# Altium PCB PCB_3U_VHDCI_Baseboard.PCBDOC (part 1 of 2)
Units mil, origin at the board's own origin, x right, y up, seen from the top; angles counter-clockwise.
Board outline 6299 x 3937 mil, 4 copper layers (TopLayer, Internal Plane 1, Internal Plane 2, BottomLayer), stack 58.425 mil thick; 56 components, 165 nets, 629 pads, 192 vias.
Unrouted connection lines stored in the file: 2.
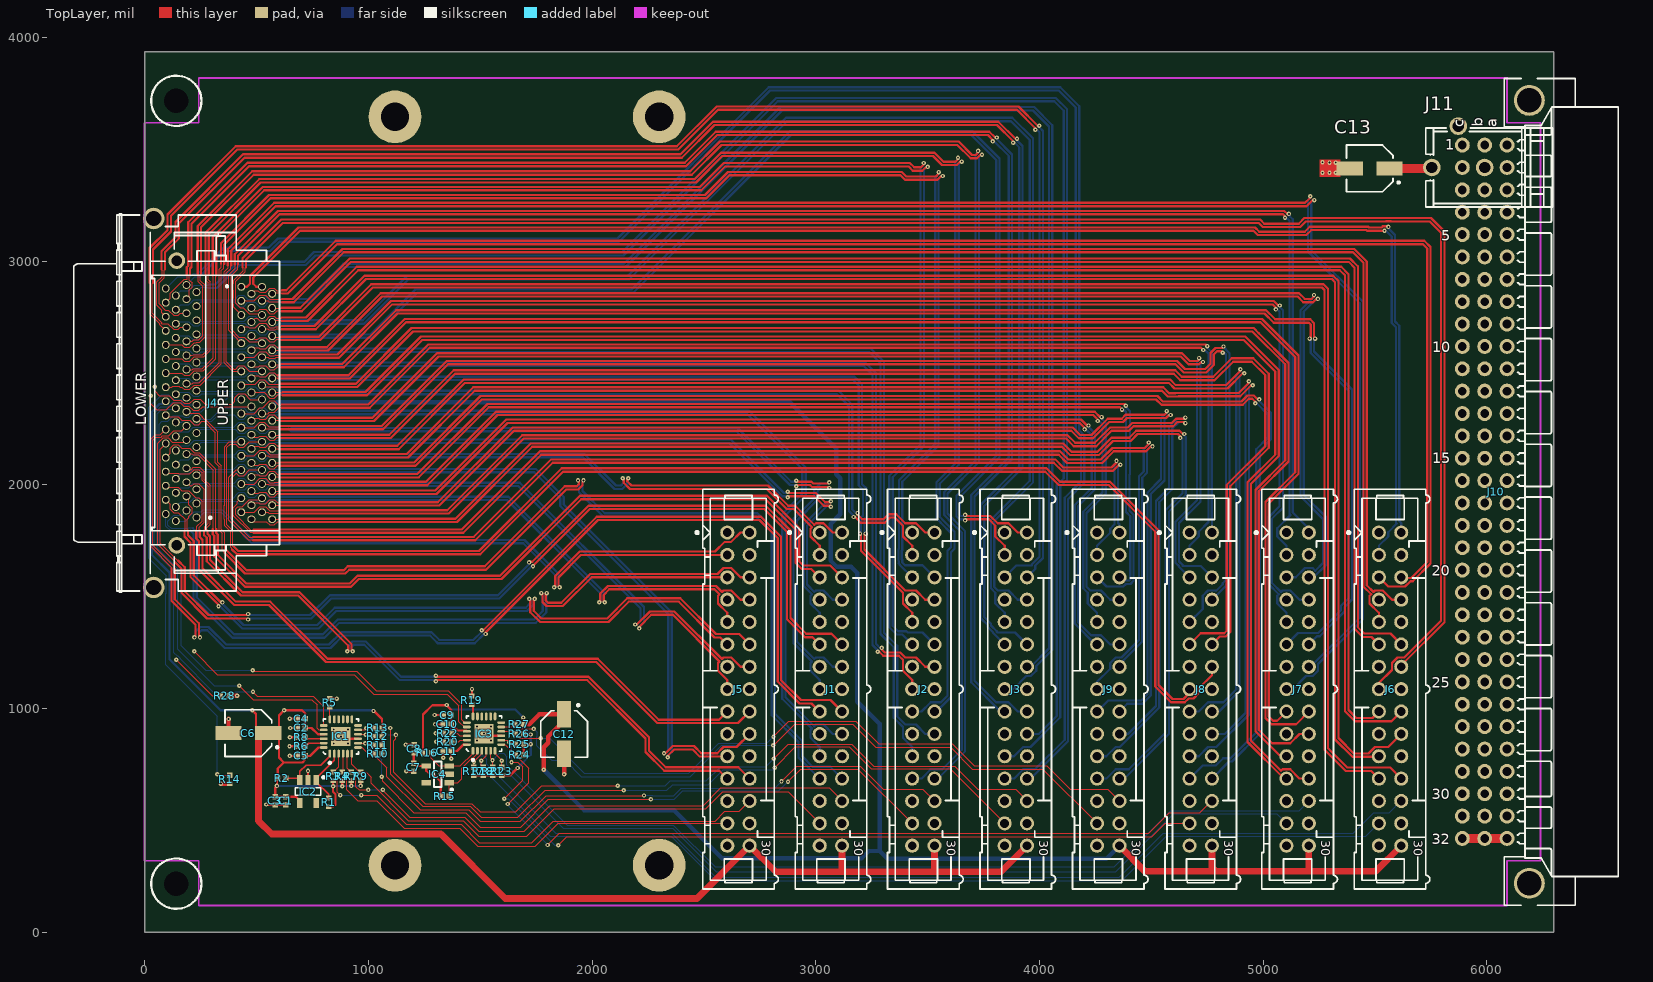
[diagram p0: TopLayer view]
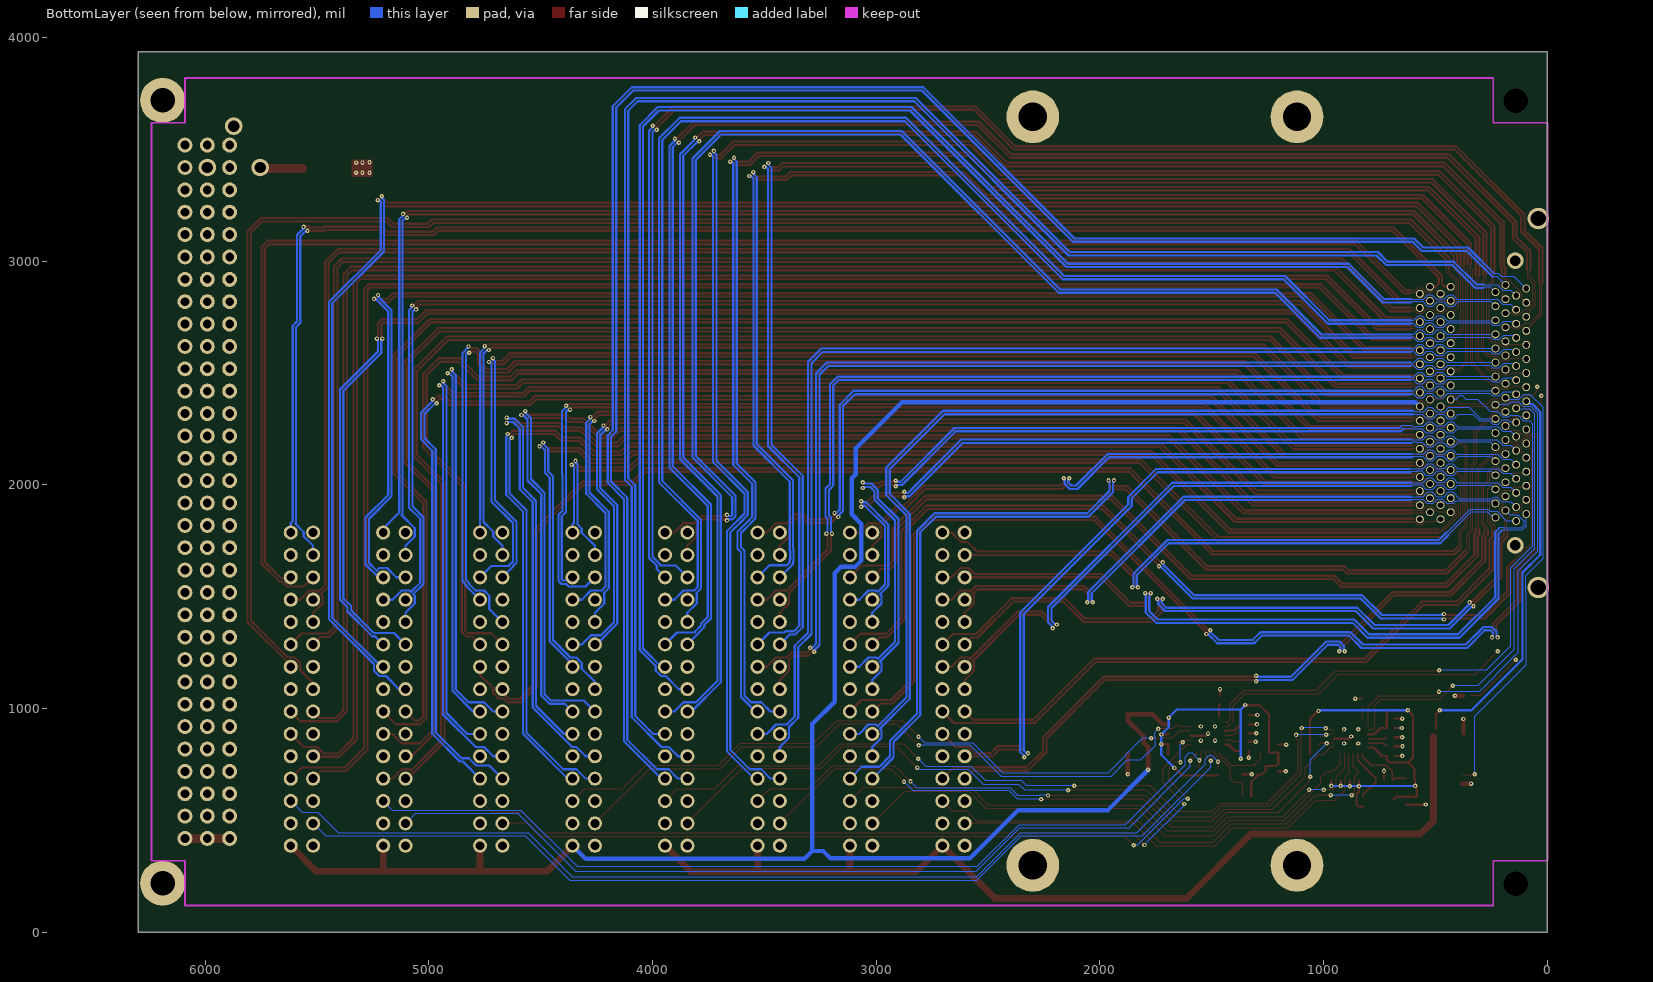
[diagram p1: BottomLayer view, seen from below]
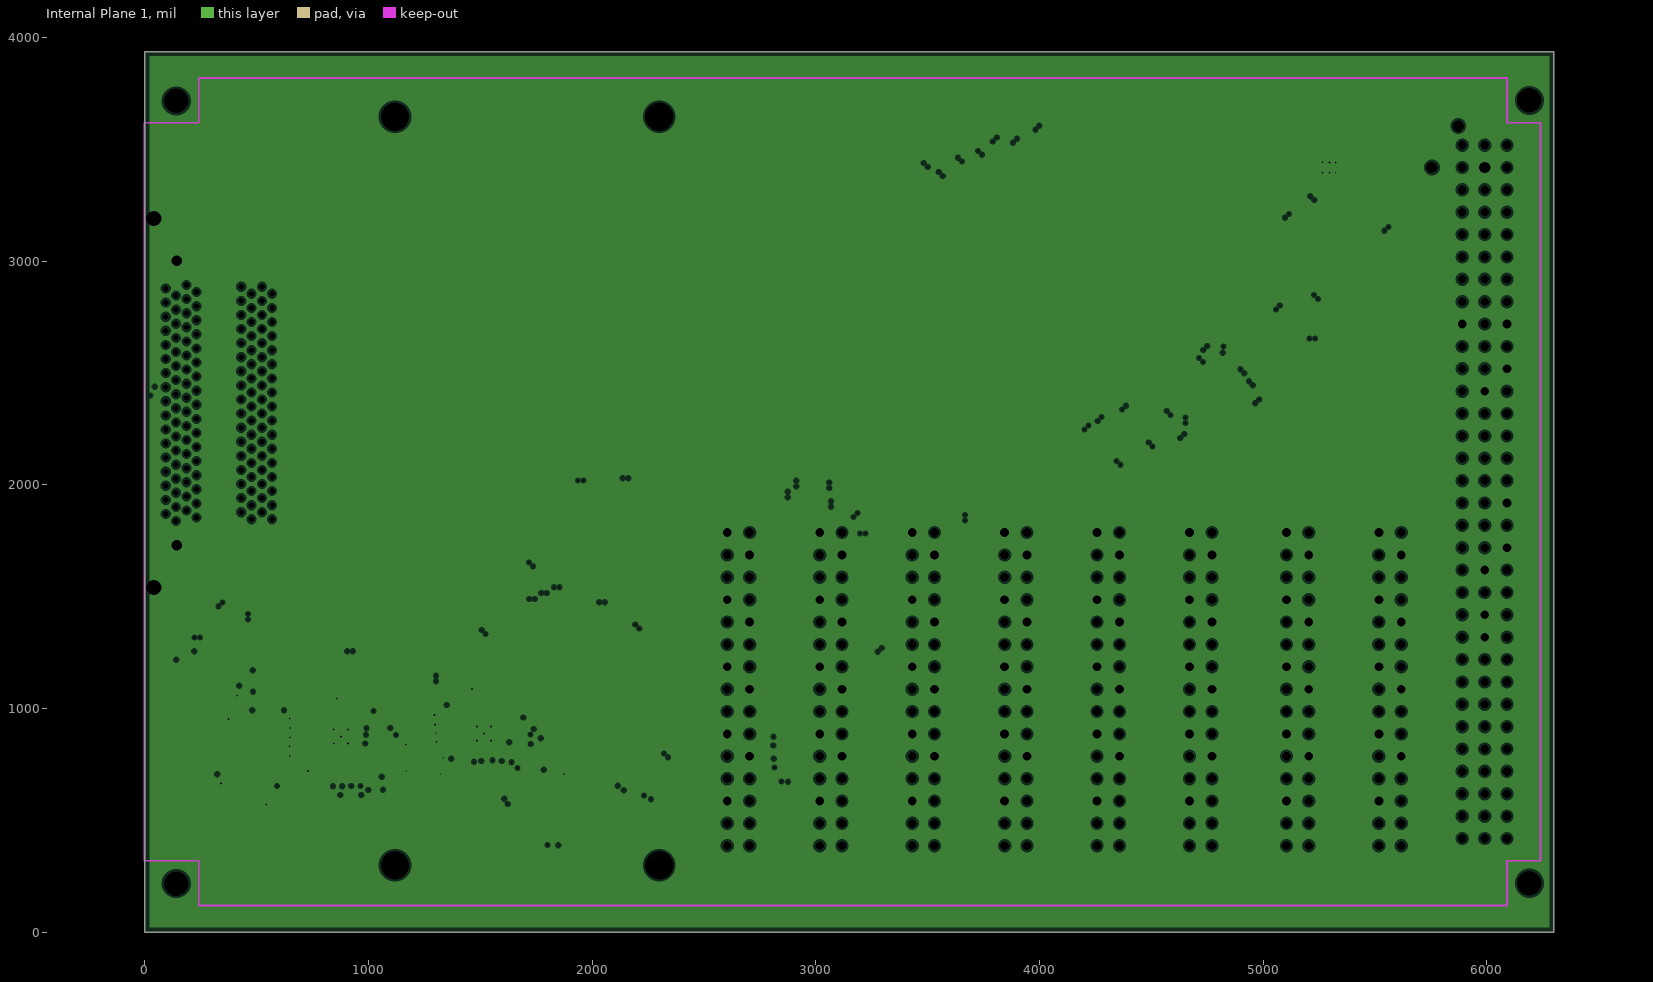
[diagram p2: Internal Plane 1, clearances drawn from the general rule]
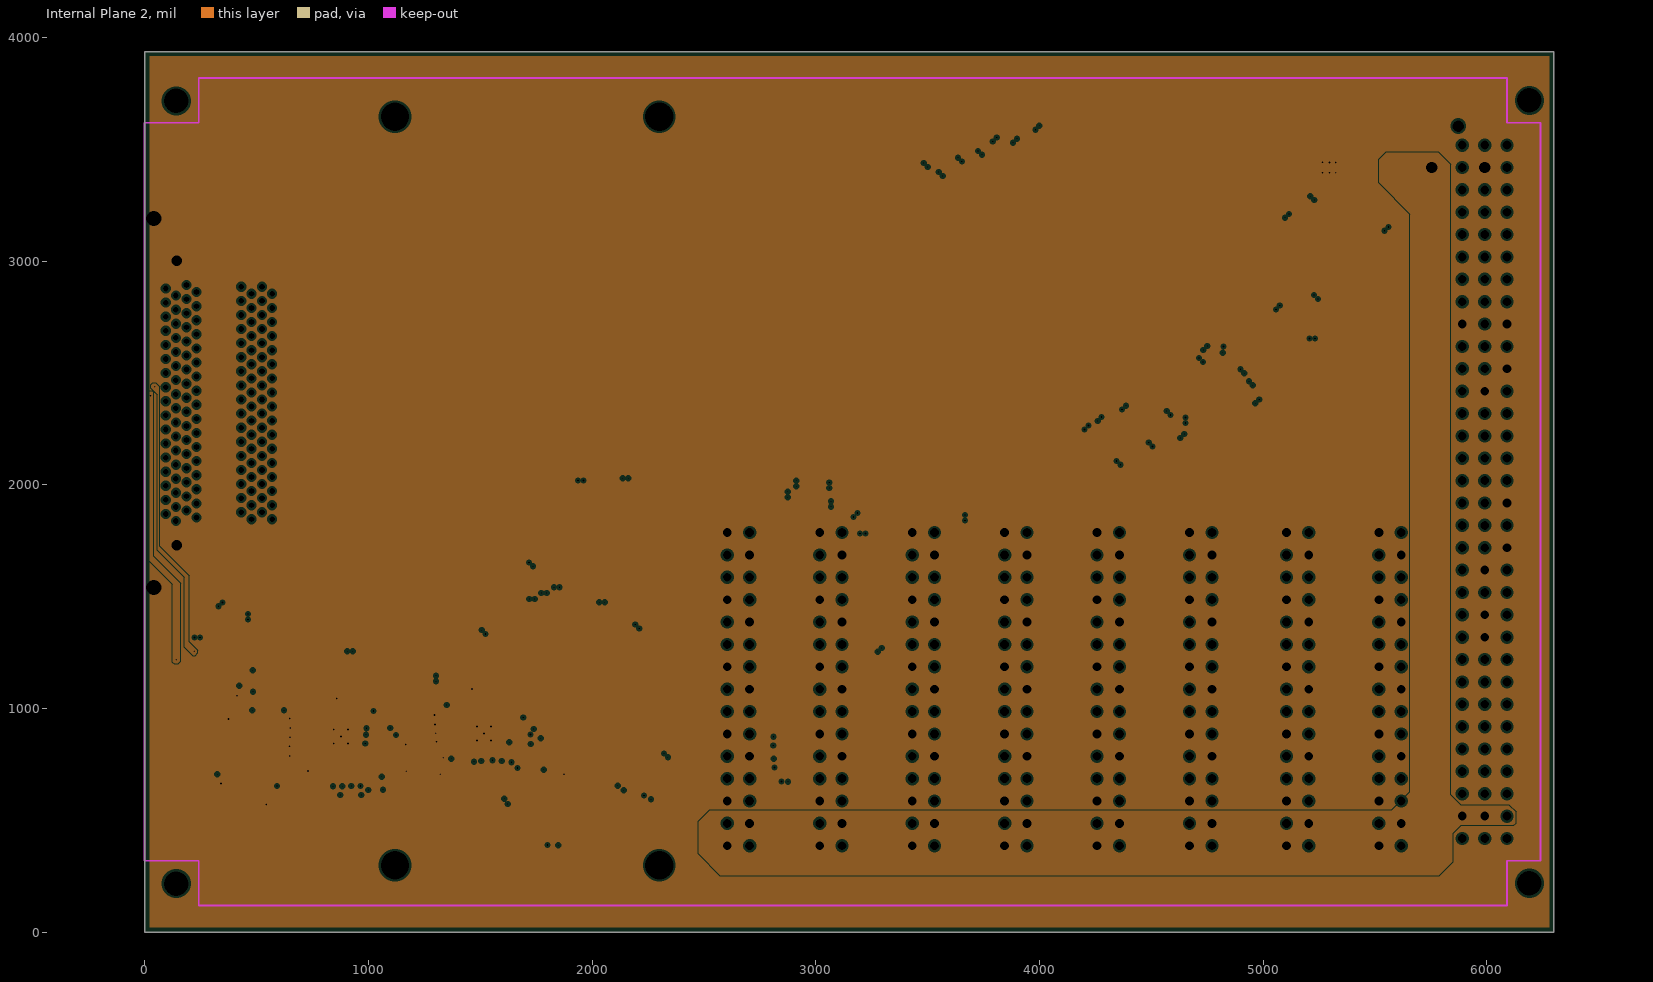
[diagram p3: Internal Plane 2, clearances drawn from the general rule]
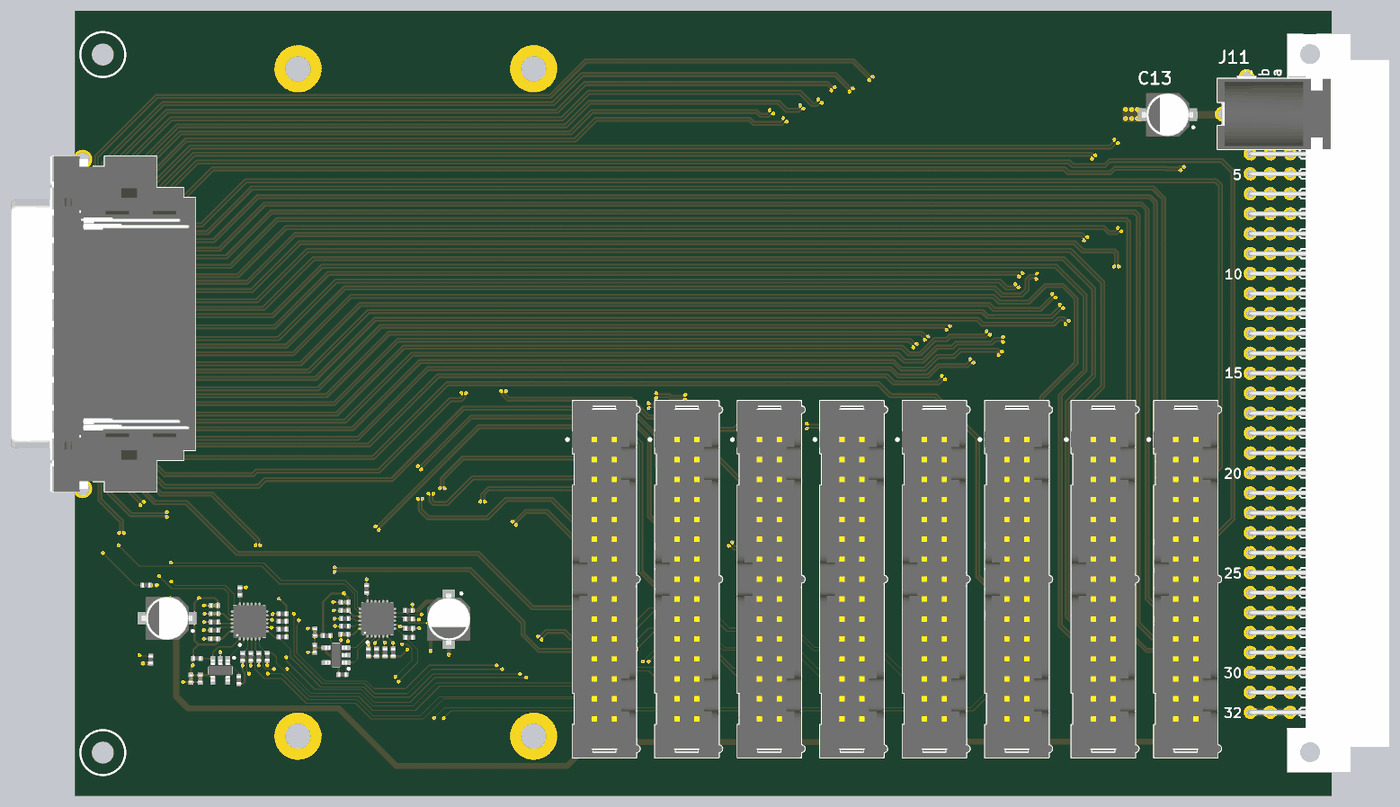
[diagram p5: 3D render of the assembled board from above, using the file's embedded part models]

## Layer stack, top to bottom
TopSolder: solder mask 0.4, Solder Resist, Dk 3.5
TopLayer: signal copper 1.378
Dielectric1: core 15, FR-4, Dk 4.8
Internal Plane 1: plane copper 1.378, net GND
Dielectric9: prepreg 27.9134, FR-4, Dk 4.2
Internal Plane 2: plane copper 1.378, net GND
Dielectric 10: core 10, Dk 4.2
BottomLayer: signal copper 1.378
BottomSolder: solder mask 0.4, Solder Resist, Dk 3.5

## Board outline
0,0 6299,0 6299,3937 0,3937

## Design rules (kind name [scope] priority, off if disabled: settings)
Clearance Clearance_1 [All] p1: gap=5
Clearance [All] p2: gap=5
DiffPairsRouting [All] p1: maxlimit=5 minlimit=5 mostfreqgap=5 toplayer_minwidth=5 toplayer_maxwidth=10 toplayer_prefwidth=10 bottomlayer_minwidth=5 bottomlayer_maxwidth=10 bottomlayer_prefwidth=10 maxuncoupledlength=500
FabricationTestPointUsage TestPointUsage [All] p1: valid=0 allowmultiple=FALSE
FabricationTestpoint Testpoint [All] p1: side=3 testpointundercomponent=TRUE minsize=40 maxsize=100 preferedsize=60 minholesize=20 maxholesize=40 preferedholesize=32 testpointgrid=1 allowsidetop=TRUE allowsidebottom=TRUE usegrid=TRUE gridtolerance=0.01
PlaneClearance [All] p1: clearance=10
PlaneConnect [All] p1: planeconnectstyle=Direct reliefexpansion=20 reliefentries=4 reliefconductorwidth=10 reliefairgap=10
PolygonConnect [All] p1: connectstyle=Direct reliefconductorwidth=10 reliefentries=4 polygonreliefangle="90 Angle" airgapwidth=10
RoomDefinition PCB_3U_VHDCI_Baseboard [InComponentClass('PCB_3U_VHDCI_Baseboard')] p1: confinementstyle=ConfineIn formatcopy=TRUE lockcomponents=FALSE outline 6340,60 35.43,60 35.43,3890 6340,3890
RoutingVias [All] p1: holewidth=7.87 width=19.68 viastyle="Through Hole" minholewidth=7.87 minwidth=19.68 maxholewidth=28 maxwidth=50
SilkToSolderMaskClearance SilkscreenOverComponentPads [IsPad] p1: minsilkscreentomaskgap=10 clearancetoexposedcopper=TRUE
SolderMaskExpansion [All] p1: expansion=2
Width [All] p1: maxlimit=50 minlimit=5 preferedwidth=10
24 further rules are at their usual default settings.

## Classes and differential pairs
differential pair LVDS8_8: +LVDS8_8_P -LVDS8_8_N
differential pair LVDS8_7: +LVDS8_7_P -LVDS8_7_N
differential pair LVDS8_6: +LVDS8_6_P -LVDS8_6_N
differential pair LVDS8_5: +LVDS8_5_P -LVDS8_5_N
differential pair LVDS8_4: +LVDS8_4_P -LVDS8_4_N
differential pair LVDS8_3: +LVDS8_3_P -LVDS8_3_N
differential pair LVDS8_2: +LVDS8_2_P -LVDS8_2_N
differential pair LVDS8_1: +LVDS8_1_P -LVDS8_1_N
differential pair LVDS7_8: +LVDS7_8_P -LVDS7_8_N
differential pair LVDS7_7: +LVDS7_7_P -LVDS7_7_N
differential pair LVDS7_6: +LVDS7_6_P -LVDS7_6_N
differential pair LVDS7_5: +LVDS7_5_P -LVDS7_5_N
differential pair LVDS7_4: +LVDS7_4_P -LVDS7_4_N
differential pair LVDS7_3: +LVDS7_3_P -LVDS7_3_N
differential pair LVDS7_2: +LVDS7_2_P -LVDS7_2_N
differential pair LVDS7_1: +LVDS7_1_P -LVDS7_1_N
differential pair LVDS6_8: +LVDS6_8_P -LVDS6_8_N
differential pair LVDS6_7: +LVDS6_7_P -LVDS6_7_N
differential pair LVDS6_6: +LVDS6_6_P -LVDS6_6_N
differential pair LVDS6_5: +LVDS6_5_P -LVDS6_5_N
differential pair LVDS6_4: +LVDS6_4_P -LVDS6_4_N
differential pair LVDS6_3: +LVDS6_3_P -LVDS6_3_N
differential pair LVDS6_2: +LVDS6_2_P -LVDS6_2_N
differential pair LVDS6_1: +LVDS6_1_P -LVDS6_1_N
differential pair LVDS5_8: +LVDS5_8_P -LVDS5_8_N
differential pair LVDS5_7: +LVDS5_7_P -LVDS5_7_N
differential pair LVDS5_6: +LVDS5_6_P -LVDS5_6_N
differential pair LVDS5_5: +LVDS5_5_P -LVDS5_5_N
differential pair LVDS5_4: +LVDS5_4_P -LVDS5_4_N
differential pair LVDS5_3: +LVDS5_3_P -LVDS5_3_N
differential pair LVDS5_2: +LVDS5_2_P -LVDS5_2_N
differential pair LVDS5_1: +LVDS5_1_P -LVDS5_1_N
differential pair LVDS4_8: +LVDS4_8_P -LVDS4_8_N
differential pair LVDS4_7: +LVDS4_7_P -LVDS4_7_N
differential pair LVDS4_6: +LVDS4_6_P -LVDS4_6_N
differential pair LVDS4_5: +LVDS4_5_P -LVDS4_5_N
differential pair LVDS4_4: +LVDS4_4_P -LVDS4_4_N
differential pair LVDS4_3: +LVDS4_3_P -LVDS4_3_N
differential pair LVDS4_2: +LVDS4_2_P -LVDS4_2_N
differential pair LVDS4_1: +LVDS4_1_P -LVDS4_1_N
differential pair LVDS3_8: +LVDS3_8_P -LVDS3_8_N
differential pair LVDS3_7: +LVDS3_7_P -LVDS3_7_N
differential pair LVDS3_6: +LVDS3_6_P -LVDS3_6_N
differential pair LVDS3_5: +LVDS3_5_P -LVDS3_5_N
differential pair LVDS3_4: +LVDS3_4_P -LVDS3_4_N
differential pair LVDS3_3: +LVDS3_3_P -LVDS3_3_N
differential pair LVDS3_2: +LVDS3_2_P -LVDS3_2_N
differential pair LVDS3_1: +LVDS3_1_P -LVDS3_1_N
differential pair LVDS2_8: +LVDS2_8_P -LVDS2_8_N
differential pair LVDS2_7: +LVDS2_7_P -LVDS2_7_N
differential pair LVDS2_6: +LVDS2_6_P -LVDS2_6_N
differential pair LVDS2_5: +LVDS2_5_P -LVDS2_5_N
differential pair LVDS2_4: +LVDS2_4_P -LVDS2_4_N
differential pair LVDS2_3: +LVDS2_3_P -LVDS2_3_N
differential pair LVDS2_2: +LVDS2_2_P -LVDS2_2_N
differential pair LVDS2_1: +LVDS2_1_P -LVDS2_1_N
differential pair LVDS1_8: +LVDS1_8_P -LVDS1_8_N
differential pair LVDS1_7: +LVDS1_7_P -LVDS1_7_N
differential pair LVDS1_6: +LVDS1_6_P -LVDS1_6_N
differential pair LVDS1_5: +LVDS1_5_P -LVDS1_5_N
differential pair LVDS1_4: +LVDS1_4_P -LVDS1_4_N
differential pair LVDS1_3: +LVDS1_3_P -LVDS1_3_N
differential pair LVDS1_2: +LVDS1_2_P -LVDS1_2_N
differential pair LVDS1_1: +LVDS1_1_P -LVDS1_1_N

## Components (designator, comment, footprint, x,y, rotation, side; value= is the part's Value field where it differs from the comment)
C1 "100nF" CAPC1005X55N 629,588 r90 top
C2 "100nF" CAPC1005X55N 699,913 r0 top
C3 "100nF" CAPC1005X55N 582,588 r90 top
C4 "100nF" CAPC1005X55N 699,955 r0 top
C5 "100nF" CAPC1005X55N 698,788 r0 top
C6 "22uF" CAPAE530X540N 462,890 r180 top
C7 "100nF" CAPC1005X55N 1202,737 r90 top
C8 "100nF" CAPC1005X55N 1203,821 r270 top
C9 "100nF" CAPC1005X55N 1352,971 r0 top
C10 "100nF" CAPC1005X55N 1352,929 r0 top
C11 "100nF" CAPC1005X55N 1351,810 r0 top
C12 "22uF" CAPAE530X540N 1874,886 r270 top
C13 "22uF" CAPAE530X540N 5476,3415 r180 top
IC1 "TCA9548ARGER" QFN50P400X400X100-25N-S220 876,875 r90 top
IC2 "24AA02E48T-I/OT" SOT95P280X145-5N 729,629 r270 top
IC3 "TCA9548ARGER" QFN50P400X400X100-25N-S220 1516,888 r90 top
IC4 "24AA02E48T-I/OT" SOT95P280X145-5N 1309,706 r180 top
J1 "Familly" 3M_N2530-6002RB 3066.93,1086.61 r270 top
J2 "Familly" 3M_N2530-6002RB 3480.31,1086.61 r270 top
J3 "Familly" 3M_N2530-6002RB 3893.7,1086.61 r270 top
J4 "VHDCI" MOLEX_74337-0015 330.71,2366.14 r90 top
J5 "Familly" 3M_N2530-6002RB 2653.54,1086.61 r270 top
J6 "Familly" 3M_N2530-6002RB 5566.93,1086.61 r270 top
J7 "Familly" 3M_N2530-6002RB 5153.54,1086.61 r270 top
J8 "Familly" 3M_N2530-6002RB 4720.47,1086.61 r270 top
J9 "Familly" 3M_N2530-6002RB 4307.09,1086.61 r270 top
J10 "DIN 41612 Type C" "HARTING_09 03 196 2921" 6090,3519 r0 top locked
J11 "Jack" CUI_PJ-102BH 5990,3419 r90 top
R1 "2k2" RESC1005X40N 821,581 r270 top
R2 "2k2" RESC1005X40N 612,689 r180 top
R3 "2k2" RESC1005X40N 841,697 r270 top
R4 "2k2" RESC1005X40N 882,697 r270 top
R5 "0" RESC1005X40N 827,1026 r270 top
R6 "0" RESC1005X40N 699,831 r0 top
R7 "2k2" RESC1005X40N 922,697 r270 top
R8 "0" RESC1005X40N 699,872 r0 top
R9 "2k2" RESC1005X40N 964,698 r270 top
R10 "2k2" RESC1005X40N 1041,797 r0 top
R11 "2k2" RESC1005X40N 1041,836 r0 top
R12 "2k2" RESC1005X40N 1041,875 r0 top
R13 "2k2" RESC1005X40N 1041,913 r0 top
R14 "0" RESC1005X40N 380,683 r90 top
R15 "2k2" RESC1005X40N 1341,608 r180 top
R16 "2k2" RESC1005X40N 1262,803 r180 top
R17 "2k2" RESC1005X40N 1471,719 r270 top
R18 "2k2" RESC1005X40N 1512,719 r270 top
R19 "0" RESC1005X40N 1462,1037 r270 top
R20 "0" RESC1005X40N 1353,851 r0 top
R21 "2k2" RESC1005X40N 1554,719 r270 top
R22 "0" RESC1005X40N 1353,889 r0 top
R23 "2k2" RESC1005X40N 1595,719 r270 top
R24 "2k2" RESC1005X40N 1675,794 r0 top
R25 "2k2" RESC1005X40N 1675,840 r0 top
R26 "2k2" RESC1005X40N 1674,888 r0 top
R27 "2k2" RESC1005X40N 1673,929 r0 top
R28 "0" RESC1005X40N 357,1057 r180 top

## Footprints (in the part's own frame and the unit in brackets; to place one, negate y for a bottom-side part, rotate by r counter-clockwise, add the part's x,y. Pads: shape width x height; smd on the part's side, far side on the other; paste and mask are expansions set on the pad)
3M_N2530-6002RB [mm] "30 Contacts - Straight .100\" x .100\" Low Profile Four-Wall Header"
  round 1.6 hole 1: 1(-17.78,-1.27) 2(-17.78,1.27) 3(-15.24,-1.27) 4(-15.24,1.27) 5(-12.7,-1.27) 6(-12.7,1.27) 7(-10.16,-1.27) 8(-10.16,1.27) 9(-7.62,-1.27) 10(-7.62,1.27) 11(-5.08,-1.27) 12(-5.08,1.27) 13(-2.54,-1.27) 14(-2.54,1.27) 15(0,-1.27) 16(0,1.27) 17(2.54,-1.27) 18(2.54,1.27) 19(5.08,-1.27) 20(5.08,1.27) 21(7.62,-1.27) 22(7.62,1.27) 23(10.16,-1.27) 24(10.16,1.27) 25(12.7,-1.27) 26(12.7,1.27) 27(15.24,-1.27) 28(15.24,1.27) 29(17.78,-1.27) 30(17.78,1.27)
  silkscreen extent -22.71,-4.85 22.71,4.52, body extent -22.71,-4.11 22.71,4.52, height 9.91
CAPAE530X540N [mm] "Capacitor, Aluminium Electrolytric, 5.3mm L X 5.3mm W X 5.4mm H, IPC Medium Density"
  rect 3x1.6 smd: 1(-2.25,0) 2(2.25,0)
  silkscreen extent -3.4,-2.65 2.65,2.65, body extent -3.25,-2.75 3.25,2.75, height 5.7
CAPC1005X55N [mm] "Chip Capacitor, Body 1.0x0.55mm, IPC Medium Density"
  rect 0.62x0.62 smd: 1(-0.45,0) 2(0.45,0)
  body extent -0.52,-0.27 0.53,0.28, height 0.55
CUI_PJ-102BH [mm] "2.5 mm Center Pin, 5A, 24V Right Angle, Through Hole, Tapered Pins, DC Power Jack Connector"
  round 2 hole 1.3: 1(0,6) 2(0,0) 3(4.7,3)
  silkscreen extent -4.5,-7.7 4.5,6.7, body extent -4.5,-7.7 4.9,6.7, height 11
"HARTING_09 03 196 2921" [mm] "Connector; DIN 41612, Type C, Thru-Hole; Rows a+b+c, 96 Position; Right Angle"
  round 1.7 hole 1: a1(0,0) a2(0,-2.54) a3(0,-5.08) a4(0,-7.62) a5(0,-10.16) a6(0,-12.7) a7(0,-15.24) a8(0,-17.78) a9(0,-20.32) a10(0,-22.86) a11(0,-25.4) a12(0,-27.94) a13(0,-30.48) a14(0,-33.02) a15(0,-35.56) a16(0,-38.1) a17(0,-40.64) a18(0,-43.18) a19(0,-45.72) a20(0,-48.26) a21(0,-50.8) a22(0,-53.34) a23(0,-55.88) a24(0,-58.42) a25(0,-60.96) a26(0,-63.5) a27(0,-66.04) a28(0,-68.58) a29(0,-71.12) a30(0,-73.66) a31(0,-76.2) a32(0,-78.74) b1(-2.54,0) b2(-2.54,-2.54) b3(-2.54,-5.08) b4(-2.54,-7.62) b5(-2.54,-10.16) b6(-2.54,-12.7) b7(-2.54,-15.24) b8(-2.54,-17.78) b9(-2.54,-20.32) b10(-2.54,-22.86) b11(-2.54,-25.4) b12(-2.54,-27.94) b13(-2.54,-30.48) b14(-2.54,-33.02) b15(-2.54,-35.56) b16(-2.54,-38.1) b17(-2.54,-40.64) b18(-2.54,-43.18) b19(-2.54,-45.72) b20(-2.54,-48.26) b21(-2.54,-50.8) b22(-2.54,-53.34) b23(-2.54,-55.88) b24(-2.54,-58.42) b25(-2.54,-60.96) b26(-2.54,-63.5) b27(-2.54,-66.04) b28(-2.54,-68.58) b29(-2.54,-71.12) b30(-2.54,-73.66) b31(-2.54,-76.2) b32(-2.54,-78.74) c1(-5.08,0) c2(-5.08,-2.54) c3(-5.08,-5.08) c4(-5.08,-7.62) c5(-5.08,-10.16) c6(-5.08,-12.7) c7(-5.08,-15.24) c8(-5.08,-17.78) c9(-5.08,-20.32) c10(-5.08,-22.86) c11(-5.08,-25.4) c12(-5.08,-27.94) c13(-5.08,-30.48) c14(-5.08,-33.02) c15(-5.08,-35.56) c16(-5.08,-38.1) c17(-5.08,-40.64) c18(-5.08,-43.18) c19(-5.08,-45.72) c20(-5.08,-48.26) c21(-5.08,-50.8) c22(-5.08,-53.34) c23(-5.08,-55.88) c24(-5.08,-58.42) c25(-5.08,-60.96) c26(-5.08,-63.5) c27(-5.08,-66.04) c28(-5.08,-68.58) c29(-5.08,-71.12) c30(-5.08,-73.66) c31(-5.08,-76.2) c32(-5.08,-78.74)
  round 3.5 / inner round 3.5 / far side round 5.1 hole 2.8: MTG1(2.54,5.08) MTG2(2.54,-83.82)
  silkscreen extent -0.31,-86.32 12.64,7.58, body extent -5.38,-86.37 12.64,7.63, height 9.35
MOLEX_74337-0015 [mm] "2x68 Positions, Pitch 0.8mm, Very Hight Density Right Angle Dual Stacked VHDCI Receptacle"
  round 1.9 hole 1.2: 69(-16.175,4.79) 71(16.175,4.79)
  round 2.45 hole 1.75: 70(-20.95,7.41) 72(20.95,7.41)
  round 0.9 hole 0.65: L1(-13.005,2.54) L2(-12.205,3.69) L3(-11.405,2.54) L4(-10.605,3.69) L5(-9.805,2.54) L6(-9.005,3.69) L7(-8.205,2.54) L8(-7.405,3.69) L9(-6.605,2.54) L10(-5.805,3.69) L11(-5.005,2.54) L12(-4.205,3.69) L13(-3.405,2.54) L14(-2.605,3.69) L15(-1.805,2.54) L16(-1.005,3.69) L17(-0.205,2.54) L18(0.595,3.69) L19(1.395,2.54) L20(2.195,3.69) L21(2.995,2.54) L22(3.795,3.69) L23(4.595,2.54) L24(5.395,3.69) L25(6.195,2.54) L26(6.995,3.69) L27(7.795,2.54) L28(8.595,3.69) L29(9.395,2.54) L30(10.195,3.69) L31(10.995,2.54) L32(11.795,3.69) L33(12.595,2.54) L34(13.395,3.69) L35(-13.405,4.89) L36(-12.605,6.04) L37(-11.805,4.89) L38(-11.005,6.04) L39(-10.205,4.89) L40(-9.405,6.04) L41(-8.605,4.89) L42(-7.805,6.04) L43(-7.005,4.89) L44(-6.205,6.04) L45(-5.405,4.89) L46(-4.605,6.04) L47(-3.805,4.89) L48(-3.005,6.04) L49(-2.205,4.89) L50(-1.405,6.04) L51(-0.605,4.89) L52(0.195,6.04) L53(0.995,4.89) L54(1.795,6.04) L55(2.595,4.89) L56(3.395,6.04) L57(4.195,4.89) L58(4.995,6.04) L59(5.795,4.89) L60(6.595,6.04) L61(7.395,4.89) L62(8.195,6.04) L63(8.995,4.89) L64(9.795,6.04) L65(10.595,4.89) L66(11.395,6.04) L67(12.195,4.89) L68(12.995,6.04) U1(13.195,-2.54) U2(12.395,-3.69) U3(11.595,-2.54) U4(10.795,-3.69) U5(9.995,-2.54) U6(9.195,-3.69) U7(8.395,-2.54) U8(7.595,-3.69) U9(6.795,-2.54) U10(5.995,-3.69) U11(5.195,-2.54) U12(4.395,-3.69) U13(3.595,-2.54) U14(2.795,-3.69) U15(1.995,-2.54) U16(1.195,-3.69) U17(0.395,-2.54) U18(-0.405,-3.69) U19(-1.205,-2.54) U20(-2.005,-3.69) U21(-2.805,-2.54) U22(-3.605,-3.69) U23(-4.405,-2.54) U24(-5.205,-3.69) U25(-6.005,-2.54) U26(-6.805,-3.69) U27(-7.605,-2.54) U28(-8.405,-3.69) U29(-9.205,-2.54) U30(-10.005,-3.69) U31(-10.805,-2.54) U32(-11.605,-3.69) U33(-12.405,-2.54) U34(-13.205,-3.69) U35(13.195,-4.89) U36(12.395,-6.04) U37(11.595,-4.89) U38(10.795,-6.04) U39(9.995,-4.89) U40(9.195,-6.04) U41(8.395,-4.89) U42(7.595,-6.04) U43(6.795,-4.89) U44(5.995,-6.04) U45(5.195,-4.89) U46(4.395,-6.04) U47(3.595,-4.89) U48(2.795,-6.04) U49(1.995,-4.89) U50(1.195,-6.04) U51(0.395,-4.89) U52(-0.405,-6.04) U53(-1.205,-4.89) U54(-2.005,-6.04) U55(-2.805,-4.89) U56(-3.605,-6.04) U57(-4.405,-4.89) U58(-5.205,-6.04) U59(-6.005,-4.89) U60(-6.805,-6.04) U61(-7.605,-4.89) U62(-8.405,-6.04) U63(-9.205,-4.89) U64(-10.005,-6.04) U65(-10.805,-4.89) U66(-11.605,-6.04) U67(-12.405,-4.89) U68(-13.205,-6.04)
  silkscreen extent -21.5,-6.89 21.5,16.5, body extent -21.5,-6.89 21.5,16.5, height 12.77
QFN50P400X400X100-25N-S220 [mm] "QFN, 0.50mm Pitch, Square; 24 Pin, 4.00mm L X 4.00mm W X 1.00mm H body (w/thermal tab 2.2 X 2.2mm), IPC Medium Density"
  oval 0.9x0.3 smd: 1(-1.95,1.25) 2(-1.95,0.75) 3(-1.95,0.25) 4(-1.95,-0.25) 5(-1.95,-0.75) 6(-1.95,-1.25) 13(1.95,-1.25) 14(1.95,-0.75) 15(1.95,-0.25) 16(1.95,0.25) 17(1.95,0.75) 18(1.95,1.25)
  oval 0.3x0.9 smd: 7(-1.25,-1.95) 8(-0.75,-1.95) 9(-0.25,-1.95) 10(0.25,-1.95) 11(0.75,-1.95) 12(1.25,-1.95) 19(1.25,1.95) 20(0.75,1.95) 21(0.25,1.95) 22(-0.25,1.95) 23(-0.75,1.95) 24(-1.25,1.95)
  rect 2.2x2.2 smd: 25(0,0)
  silkscreen extent -3.12,-2 2,2, body extent -2.07,-2.07 2.08,2.08, height 1
RESC1005X40N [mm] "Chip Resistor, EIA 0402, Metric 1005, Body 1.0x0.5mm, IPC Medium Density"
  rect 0.58x0.62 smd: 1(-0.47,0) 2(0.47,0)
  body extent -0.52,-0.27 0.53,0.28, height 0.4
SOT95P280X145-5N [mm] "SOT, 0.95mm pitch; 5 pin, 1.60mm W X 2.90mm L X 1.45mm H body, IPC Medium Density"
  rect 1.1x0.6 smd: 1(-1.3,0.95) 2(-1.3,0) 3(-1.3,-0.95) 4(1.3,-0.95) 5(1.3,0.95)
  silkscreen extent -1.72,-1.45 0.43,1.88, body extent -1.4,-1.5 1.4,1.5, height 1.45

## Part data
C1 C2 C3 C4 C5 C7 C8 C9 C10 C11: library part CC0402_100NF_16V_10%_X5R, "Non-polarised capacitor"
C6 C12 C13: library part CAE530-540_22UF_16V_20%, "Polarised capacitor"
IC1 IC3: "Low Voltage 8-Channel I2C Switch With Reset"
IC2 IC4: "1.7V-5.5V, 2K I2C Serial EEPROM With EUI-48 Node Identity"
J1 J2 J3 J5 J6 J7 J8 J9: library part 3M_N2530-6002RB, "Connector 30 Male"
J4: library part MOLEX_74337-0015, "Very High Density Cable Interconnect (VHDCI ) 2x68 Female"
J10: library part "HARTING_09 03 196 2921", "Connector 96abc male (3x32)"
J11: library part CUI_PJ-102BH, "2.5 mm Center Pin, 5A, 24V Right Angle, Through Hole, Tapered Pins, DC Power Jack Connector"
R1 R2 R3 R4 R7 R9 R10 R11 R12 R13 R15 R16 R17 R18 R21 R23 R24 R25 R26 R27: library part R0402_2K2_1%_0.0625W_100PPM, "Resistor - 1%"
R5 R6 R8 R14 R19 R20 R22 R28: library part R0402_0R_JUMPER, "Resistor"

## Free pads (board coordinates)
  round 236.22 hole 125.98: 0(2299.21,299.21) 1(2299.21,3645.67) 2(1118.11,3645.67) 3(1118.11,299.21)
  round 50 hole 110: 1(140,3717) 2(140,217)

## Via types
v1: diameter 19.68, hole 7.87, TopLayer to BottomLayer, 192 vias

## Nets (pads, with @x,y where several pads share a name; then routed paths per layer and width w, separated by ;. In a path a pad name is that pad's centre, name@x,y a point inside that pad or via, vN(x,y) a via of type N, cw(c..) or ccw(c..) an arc to the next point about the centre after c; other vN are vias at no path point)
GND: C1.1 C2.1 C3.1 C4.1 C5.1 C6.2 C7.1 C8.1 C9.1 C10.1 C11.1 C12.2 C13.2 IC1.9 IC1.25 IC2.2 IC3.9 IC3.25 IC4.2 J1.1 J1.4 J1.7 J1.10 J1.13 J1.16 J1.19 J1.22 J1.25 J2.1 J2.4 J2.7 J2.10 J2.13 J2.16 J2.19 J2.22 J2.25 J3.1 J3.4 J3.7 J3.10 J3.13 J3.16 J3.19 J3.22 J3.25 J4.69 J4.70 J4.71 J4.72 J5.1 J5.4 J5.7 J5.10 J5.13 J5.16 J5.19 J5.22 J5.25 J6.1 J6.4 J6.7 J6.10 J6.13 J6.16 J6.19 J6.22 J6.25 J7.1 J7.4 J7.7 J7.10 J7.13 J7.16 J7.19 J7.22 J7.25 J8.1 J8.4 J8.7 J8.10 J8.13 J8.16 J8.19 J8.22 J8.25 J9.1 J9.4 J9.7 J9.10 J9.13 J9.16 J9.19 J9.22 J9.25 J10.a9 J10.a11 J10.a17 J10.a19 J10.b2 J10.b12 J10.b20 J10.b22 J10.b23 J10.c9 J11.2 R5.1 R6.1 R8.1 R14.1 R19.1 R20.1 R22.1 R28.1 | length 1033
  TopLayer w10: v1(542.57,571) 543.28,570.28 C3.1@582,570.28 C1.1@629,570.28 ; v1(646,831) R6.1@680.5,831 ; v1(647,788) C5.1@680.28,788 ; v1(647,955) C4.1@681.28,955 ; v1(648,872) R8.1@680.5,872 ; v1(650,913) C2.1@681.28,913 ; IC2.2@729,680.18 v1(729,721) ; R5.1@827,1044.5 v1(857.5,1044.5) ; v1(876,875) 885.84,865.16 IC1.9@952.77,865.16 ; v1(1166.28,838.72) C8.1@1203,838.72 ; v1(1168.28,719.28) C7.1@1202,719.28 ; v1(1295,971) C9.1@1334.28,971 ; v1(1297,929) C10.1@1334.28,929 ; v1(1300,889) R22.1@1334.5,889 ; v1(1303,851) R20.1@1334.5,851 ; v1(1320,706) IC4.2@1360.18,706 ; v1(1333.28,779.72) C11.1@1333.28,810 ; R19.1@1462,1055.5 v1(1462,1087) ; v1(1516,888) 1525.84,878.16 IC3.9@1592.77,878.16
  TopLayer w20: v1(339.5,664.5) R14.1@380,664.5 ; C6.2@373.42,890 373.42,953.42 v1(373.83,953) ; R28.1@375.5,1057 v1(412,1057) ; v1(1874,706) C12.2@1874,797.42
  other v1: 844.5,843.5 907.5,843.5 1484.5,856.51 1547.49,856.51 844.5,906.5 907.5,906.5 1484.5,919.5 1547.49,919.5 5265,3396 5296,3396 5324,3396 5296,3441 5324,3441 5265,3442
I2C1_SCL: IC1.4 J5.27 R4.1 | length 2019.1
  TopLayer w5: IC1.4@885.84,798.23 885.84,719.35 R4.1@882,715.5 882,714 902,694 902,637 951,588 1036,588 1159,465 1407,465 1487,385 1746,385 1847.62,486.62 J5.27@2603.55,486.62
I2C1_SDA: IC1.3 J5.26 R3.1 | length 2203.9
  TopLayer w5: IC1.3@866.16,798.23 866.16,740.66 R3.1@841,715.5 860.7,695.8 860.7,626.3 v1@868.5,618.5 ; v1@868,618 v1(873,613) ; v1(967,613) 1037,613 1168,482 1414,482 1495,401 1730,401 1826,497 2549,497 2592,540 2656.93,540 J5.26@2703.55,586.62
  BottomLayer w5: v1(873,613) v1(967,613)
I2C2_SCL: IC1.6 J1.27 R9.1 | length 2425.9
  TopLayer w5: IC1.6@925.21,798.23 925.21,751.29 R9.1@961,715.5 ; R9.1@964,716.5 987.5,716.5 1011,693 1011,665.47 1178.24,498.24 1422.76,498.24 1492,429 1708,429 1830,551 2508,551 2584,627 2876.55,627 J1.27@3016.93,486.62
I2C2_SDA: IC1.5 J1.26 R7.1 | length 2525.3
  TopLayer w5: IC1.5@905.53,798.23 905.53,731.98 R7.1@922,715.5 943,694.5 943,650.47 957.47,636 v1(998,636) ; v1@1062.5,635.5 1183.5,514.5 1430.5,514.5 1493,452 1696,452 1810,566 2496,566 2575,645 3058.55,645 J1.26@3116.93,586.62
  BottomLayer w5: v1(998,636) 1063,636 v1(1064,637)
I2C3_SCL: IC1.8 J2.27 R11.1 | length 2935.7
  TopLayer w5: IC1.8@952.77,845.47 983.53,845.47 v1(985,844) 1014.5,844 R11.1@1022.5,836 ; v1(1059,695) 1063,691 1063,674 1202,535 1434,535 1499,470 1680,470 1804,594 2223.47,594 2223.82,593.66 2261.66,593.66 v1(2262,594) ; v1(2875,673) 2931,729 3187.93,729 J2.27@3430.32,486.62
  BottomLayer w5: v1(985,844) 1059,770 v1(1059,695) ; v1(2262,594) 2366,594 2404,632 2834,632 v1(2875,673)
I2C3_SDA: IC1.7 J2.26 R10.1 | length 2907.2
  TopLayer w5: IC1.7@952.77,825.79 970.21,825.79 1002.5,793.5 1022.5,793.5 1081,735 1081,696 1230.5,546.5 1447.5,546.5 1499,495 1679,495 1795,611 v1(2231,611) v1@2229,609 ; v1(2846,674) 2914,742 3198,742 3300,640 3476.93,640 J2.26@3530.32,586.62
  BottomLayer w5: v1(2231,611) 2231.34,611.34 2269.18,611.34 2269.53,611 2365,611 2398,644 2816,644 v1(2846,674)
I2C4_SCL: IC1.11 J3.27 R13.1 | length 3485.8
  TopLayer w5: IC1.11@952.77,904.53 982.53,904.53 v1(990,912) 991,913 R13.1@1022.5,913 ; v1(1097,913) 1098,912 1098,707 1242,563 1454,563 1504,513 1667,513 1789,635 v1(2141,635) ; v1(2815,736) 2908,829 3149,829 3248,730 3600.32,730 J3.27@3843.7,486.62
  BottomLayer w5: v1(990,912) 991,913 v1(1097,913) ; v1(2141,635) 2334,635 2359,660 2519,660 2586,727 2806,727 v1(2815,736)
I2C4_SDA: IC1.10 J3.26 R12.1 | length 3516.7
  TopLayer w5: IC1.10@952.77,884.84 986.16,884.84 v1(988,883) 996,875 R12.1@1022.5,875 ; v1(1122,882) 1122,864 1113,855 1113,715 1253,575 1461,575 1498,538 1657,538 1774,655 v1(2114,655) v1@2112,657 ; v1(2811,775) 2877,841 3160,841 3259,742 3620,742 3724,638 3892.32,638 J3.26@3943.7,586.62
  BottomLayer w5: v1(988,883) 1121,883 v1(1122,882) ; v1(2114,655) 2327,655 2348,676 2510,676 2574,740 2776,740 v1(2811,775)
I2C5_SCL: IC3.4 J6.27 R18.1 | length 4445.1
  TopLayer w5: R18.1@1512,737.5 1504,745.5 v1(1504,766) 1525.84,787.84 IC3.4@1525.84,811.23
  BottomLayer w5: v1(1504,766) 1504,737 1813,428 2353,428 2552,229 4367,229 4566,428 5458.32,428 J6.27@5516.93,486.62
I2C5_SDA: IC3.3 J6.26 R17.1 | length 4624.6
  TopLayer w5: R17.1@1471,737.5 v1(1471,762) 1506.16,797.16 IC3.3@1506.16,811.23
  BottomLayer w5: v1(1471,762) 1497,788 1514,788 1528,774 1528,750 1836,442 2356,442 2552,246 4356,246 4552,442 5403,442 5495,534 5564.32,534 J6.26@5616.93,586.62
I2C6_SCL: IC3.6 J7.27 R23.1 | length 3941
  TopLayer w5: IC3.6@1565.21,811.23 1565.21,797.79 1595,768 v1(1595,766) ; R23.1@1595,737.5 v1(1595,766) ; v1@1596,767 v1(1595,766)
  BottomLayer w5: v1(1595,766) 1595,741 1871,465 2359,465 2554,270 4340,270 4599,529 5061.16,529 J7.27@5103.55,486.62
I2C6_SDA: IC3.5 J7.26 R21.1 | length 4092.9
  TopLayer w5: IC3.5@1545.53,811.23 1545.53,777.47 v1(1554,769) R21.1@1554,737.5
  BottomLayer w5: v1(1554,769) 1584,799 1604,799 1618,785 1618,748 1888,478 2363,478 2549,292 4334.59,292 4586.59,544 5160.93,544 J7.26@5203.55,586.62
I2C7_SCL: IC3.8 J8.27 R25.1 | length 3589.2
  TopLayer w5: IC3.8@1592.77,858.47 1619.53,858.47 v1(1629,849) 1647.5,849 R25.1@1656.5,840 ; v1(1606,597) 1688,679 1688,739 1667,760 v1(1639,760) ; v1(1848,389) 1885,426 4502,426 4562.62,486.62 J8.27@4670.48,486.62
  BottomLayer w5: v1(1606,597) 1625,597 1833,389 v1(1848,389) ; v1(1629,849) 1639,839 v1(1639,760)
I2C7_SDA: IC3.7 J8.26 R24.1 | length 3676.3
  TopLayer w5: IC3.7@1592.77,838.79 1611.71,838.79 R24.1@1656.5,794 1717,733.5 1717,668 v1(1622,573) ; v1(1800,390) 1853,443 4489,443 4579,533 4716.86,533 J8.26@4770.48,586.62
  BottomLayer w5: v1(1622,573) 1622,568 v1(1800,390)
I2C8_SCL: IC3.11 J9.27 R27.1 | length 3081.6
  TopLayer w5: IC3.11@1592.77,917.53 1643.02,917.53 R27.1@1654.5,929 1674.5,909 v1(1738,909) ; v1(2809,835) 2811,835 2906,930 3164,930 3268,826 3602,826 3699,729 4014.71,729 J9.27@4257.09,486.62
  BottomLayer w5: v1(1738,909) 1753,894 1753,874.18 1752.66,873.84 1752.66,834.34 1819,768 1879,768 1951,696 2439,696 2578,835 v1(2809,835)
I2C8_SDA: IC3.10 J9.26 R26.1 | length 3086.1
  TopLayer w5: IC3.10@1592.77,897.84 1645.65,897.84 R26.1@1655.5,888 1655.5,886.82 1675.66,866.66 v1(1770,866.66) ; v1(2810,874) 2879,943 3179,943 3280,842 3610,842 3708,744 4031,744 4136,639 4304.71,639 J9.26@4357.09,586.62
  BottomLayer w5: v1(1770,866.66) 1809.34,866.66 1965,711 2432,711 2566,845 2781,845 v1(2810,874)
LVDS1_1_N: J4.L35 J5.3 | length 2756.8
  TopLayer w10: v1(1853.84,1542) 1849,1546.84 1849,1586 1950,1687 2534,1687 2534.38,1686.62 J5.3@2603.55,1686.62
  BottomLayer w5: J4.L35@138.19,1838.39 179.3,1838.39 220.26,1879.35 251.21,1879.35 256.93,1885.07 259.86,1888 346.14,1888 349.07,1885.07 447.57,1786.57 451.11,1786.57
  BottomLayer w10: 451.11,1786.57 483.68,1754 1697.21,1754 1849,1602.21 1849,1543 1850,1542 v1(1853.84,1542)
LVDS1_1_P: J4.L1 J5.2 | length 2792.9
  TopLayer w10: v1(1829.16,1542) 1834,1546.84 1834,1592.21 1943.79,1702 2544.22,1702 2544.61,1701.62 2548.62,1701.62 2592.12,1745.12 2620.73,1745.12 2662.23,1786.62 J5.2@2703.55,1786.62
  BottomLayer w5: J4.L1@230.71,1854.13 240.13,1854.13 264,1878 342,1878 440.5,1779.5 440.5,1775.96
  BottomLayer w10: 440.5,1775.96 477.46,1739 1691,1739 1834,1596 1834,1543 1833,1542 v1(1829.16,1542)
LVDS1_2_N: J4.L36 J5.6 | length 3290.2
  TopLayer w10: v1(1796.84,1516) 1792,1511.16 1792,1483 1802,1473 1861.79,1473 1990.79,1602 2504.22,1602 2504.61,1601.62 2559.86,1601.62 2586.36,1628.11 2620.73,1628.11 2662.23,1586.62 J5.6@2703.55,1586.62
  BottomLayer w5: J4.L36@92.91,1869.88 92.91,1815.86 112.77,1796 203,1796
  BottomLayer w10: 203,1796 217,1782 217,1491.79 391.79,1317 802.21,1317 868.21,1383 1747.21,1383 1794,1429.79 1794,1506.29 v1@1792,1508.29
LVDS1_2_P: J4.L2 J5.5 | length 3226.8
  TopLayer w10: v1(1772.16,1516) 1777,1511.16 1777,1476.79 1795.79,1458 1868,1458 1997,1587 2494,1587 2494.38,1586.62 J5.5@2603.55,1586.62
  BottomLayer w5: J4.L2@185.43,1885.63 163.41,1863.6 127.74,1863.6 104.14,1840 102.91,1840 102.91,1820 116.91,1806 194,1806 196.5,1808.5 211.71,1808.5 214.21,1806
  BottomLayer w10: 214.21,1806 232,1788.21 232,1498 398,1332 796,1332 862,1398 1741,1398 1779,1436 1779,1500.08 1777,1502.08 1777,1511.16 v1(1772.16,1516)
LVDS1_3_N: J4.L37 J5.9 | length 2913.3
  TopLayer w10: v1(2055.84,1475) 2051,1479.84 2051,1508 2076,1533 2546.56,1533 2568.9,1510.65 2562.05,1503.8 2562.05,1469.43 2603.55,1427.93 J5.9@2603.55,1386.62
  BottomLayer w5: J4.L37@138.19,1901.38 160.22,1923.4 201.33,1923.4 220.26,1942.34 241.15,1942.34 247.01,1936.49 390.79,1936.49 420.26,1965.96 441.15,1965.96 462.65,1944.47 491.29,1944.47 512.78,1965.96 533.67,1965.96 555.17,1944.47 606,1944.47 608.5,1946.97
  BottomLayer w10: 608.5,1946.97 1625.24,1946.97 2051,1521.21 2051,1479.84 v1(2055.84,1475)
LVDS1_3_P: J4.L3 J5.8 | length 2806.9
  TopLayer w10: v1(2031.16,1475) 2036,1479.84 2036,1514.21 2069.79,1548 2552.77,1548 2579.51,1521.26 2586.36,1528.11 2620.73,1528.11 2662.23,1486.62 J5.8@2703.55,1486.62
  BottomLayer w5: J4.L3@230.71,1917.13 240.07,1926.49 409.31,1926.49 420.26,1915.53 446.6,1915.53 465.54,1934.47 493.85,1934.47 512.78,1915.53 533.67,1915.53 552.61,1934.47 606,1934.47 608.5,1931.97
  BottomLayer w10: 608.5,1931.97 1619.03,1931.97 2036,1515 2036,1479.84 v1(2031.16,1475)
LVDS1_4_N: J4.L38 J5.12 | length 3267.7
  TopLayer w5: J4.L38@92.91,1932.87 112.97,1912.81 112.97,1890.93 127.74,1876.16 149.63,1876.16 179.5,1846.29 179.5,1798 177,1795.5
  TopLayer w10: 177,1795.5 177,1768.79 203,1742.79 203,1589.79 328.97,1463.82 v1(328.97,1456.97) ; v1(1742.84,1490) 1738,1485.16 1738,1437 1773,1402 2065.79,1402 2156.79,1493 2393,1493 2553,1333 2657.16,1333 J5.12@2703.55,1286.62
  BottomLayer w10: v1(328.97,1456.97) 335.82,1456.97 434.79,1358 777,1358 855,1436 1708.21,1436 1738,1465.79 1738,1485.16 v1(1742.84,1490)
LVDS1_4_P: J4.L4 J5.11 | length 3122.9
  TopLayer w5: J4.L4@185.43,1948.62 196,1938.05 196,1910.72 210.65,1896.07 210.65,1875.18 196,1860.53 196,1852.79 189.5,1846.29 189.5,1798 192,1795.5
  TopLayer w10: 192,1795.5 192,1775 218,1749 218,1596 339.58,1474.42 v1(346.42,1474.42) ; v1(1718.16,1490) 1723,1485.16 1723,1430.79 1766.79,1387 2072,1387 2163,1478 2386.79,1478 2546.79,1318 2572.16,1318 J5.11@2603.55,1286.62
  BottomLayer w10: v1(346.42,1474.42) 346.42,1467.58 441,1373 770.79,1373 848.79,1451 1702,1451 1723,1472 1723,1485.16 v1(1718.16,1490)
LVDS1_5_N: J4.L39 J5.15 | length 3098.8
  TopLayer w10: v1(2209.92,1358.08) 2209.92,1364.92 2264,1419 2360.56,1419 2568.9,1210.65 2562.05,1203.8 2562.05,1169.43 2603.55,1127.93 J5.15@2603.55,1086.62
  BottomLayer w5: J4.L39@138.19,1964.37 160.22,1986.4 195.88,1986.4 216.48,2007 398.31,2007 420.26,2028.96 441.15,2028.96 460.09,2010.02 493.85,2010.02 512.78,2028.96 533.67,2028.96 555.17,2007.46 606,2007.46 608.5,2009.96
  BottomLayer w10: 608.5,2009.96 1675.25,2009.96 2230.89,1454.32 2230.89,1385.89 2209.92,1364.92 v1(2209.92,1358.08)
LVDS1_5_P: J4.L5 J5.14 | length 2980.6
  TopLayer w10: v1(2192.47,1375.53) 2199.32,1375.53 2257.79,1434 2366.77,1434 2579.51,1221.26 2586.36,1228.11 2620.73,1228.11 2662.23,1186.62 J5.14@2703.55,1186.62
  BottomLayer w5: J4.L5@230.71,1980.12 247.59,1997 401.79,1997 420.26,1978.52 446.6,1978.52 465.54,1997.46 493.85,1997.46 512.78,1978.52 539.12,1978.52 558.06,1997.46 606,1997.46 608.5,1994.96
  BottomLayer w10: 608.5,1994.96 1669.04,1994.96 2215.89,1448.11 2215.89,1392.11 2199.32,1375.53 v1(2192.47,1375.53)
LVDS1_6_N: J4.L40 J5.18 | length 3281.3
  TopLayer w5: J4.L40@92.91,1995.87 99.19,1989.59 148.63,1989.59 164.38,1973.84 195.88,1973.84 227.37,1942.34 241.15,1942.34 256,1927.5 256,1838 232,1814 232,1799 229.5,1796.5
  TopLayer w10: 229.5,1796.5 229.5,1760.29 242,1747.79 242,1620.79 399.79,1463 554.5,1463 809.5,1208 2018,1208 2291,935 2651.93,935 J5.18@2703.55,986.62
LVDS1_6_P: J4.L6 J5.17 | length 3113.8
  TopLayer w5: J4.L6@185.43,2011.61 202.05,1995 209.93,1995 220.26,2005.33 241.15,2005.33 266,1980.49 266,1833.86 242,1809.86 242,1799 244.5,1796.5
  TopLayer w10: 244.5,1796.5 244.5,1766.5 257,1754 257,1627 406,1478 560.71,1478 815.71,1223 2024.21,1223 2297.21,950 2566.93,950 J5.17@2603.55,986.62
LVDS1_7_N: J4.L41 J5.21 | length 3507.9
  TopLayer w10: v1(2337.92,782.08) 2337.92,788.92 2366,817 2448.79,817 2480.79,785 2601.93,785 J5.21@2603.55,786.62
  BottomLayer w5: J4.L41@138.19,2027.36 160.22,2049.39 195.88,2049.39 215.49,2069 397.32,2069 420.26,2091.95 441.15,2091.95 460.09,2073.01 493.85,2073.01 512.78,2091.95 533.67,2091.95 555.17,2070.45 583.09,2070.45 584.54,2069 609,2069 611.5,2071.5
  BottomLayer w10: 611.5,2071.5 1746.71,2071.5 1872,1946.21 1872,1912.21 2354.89,1429.32 2354.89,805.89 2337.92,788.92 v1(2337.92,782.08)
LVDS1_7_P: J4.L7 J5.20 | length 3511.7
  TopLayer w10: v1(2320.47,799.53) 2327.32,799.53 2359.79,832 2455,832 2487,800 2558.25,800 2586.36,828.11 2645.04,828.11 J5.20@2703.55,886.62
  BottomLayer w5: J4.L7@230.71,2043.11 246.6,2059 402.78,2059 420.26,2041.52 446.6,2041.52 465.54,2060.45 493.85,2060.45 512.78,2041.52 539.12,2041.52 558.06,2060.45 578.95,2060.45 580.4,2059 609,2059 611.5,2056.5
  BottomLayer w10: 611.5,2056.5 1740.5,2056.5 1857,1940 1857,1906 2339.89,1423.11 2339.89,812.11 2327.32,799.53 v1(2320.47,799.53)
LVDS1_8_N: J4.L42 J5.24 | length 3538
  TopLayer w5: J4.L42@92.91,2058.86 99.19,2052.58 148.63,2052.58 151.82,2049.39 201.33,2049.39 220.26,2068.33 241.15,2068.33 255.93,2053.56 255.93,2019.86 282,1993.78 282,1827.37 267,1812.37 267,1797 264.5,1794.5
  TopLayer w10: 264.5,1794.5 264.5,1774.79 276,1763.29 276,1658.79 429.79,1505 685.21,1505 909,1281.21 909,1260.84 v1(904.16,1256) ; v1(1301,1146.84) 1305.84,1142 1983.21,1142 2253,872.21 2253,812 2328,737 2653.16,737 J5.24@2703.55,686.62
  BottomLayer w10: v1(904.16,1256) 909,1260.84 909,1281.21 927.79,1300 987.21,1300 1145.21,1142 1296.16,1142 v1(1301,1146.84)
LVDS1_8_P: J4.L8 J5.23 | length 3326
  TopLayer w5: J4.L8@185.43,2074.61 191.71,2068.33 206.12,2068.33 216.12,2078.33 245.3,2078.33 265.93,2057.7 265.93,2024 292,1997.93 292,1823.23 277,1808.23 277,1797 279.5,1794.5
  TopLayer w10: 279.5,1794.5 279.5,1781 291,1769.5 291,1665 436,1520 691.43,1520 924,1287.43 924,1260.84 v1(928.84,1256) ; v1(1301,1122.16) 1305.84,1127 1977,1127 2238,866 2238,805.79 2321.79,722 2568.16,722 J5.23@2603.55,686.62
  BottomLayer w10: v1(928.84,1256) 924,1260.84 924,1275 934,1285 981,1285 1139,1127 1296.16,1127 v1(1301,1122.16)
LVDS2_1_N: J1.3 J4.L43 | length 3231.9
  TopLayer w10: v1(2136.16,2030) 2141,2025.16 2141,2009.79 2168.79,1982 2779.79,1982 2869.79,1892 2900.94,1892 2982.29,1810.65 2975.44,1803.8 2975.44,1769.43 3016.93,1727.93 J1.3@3016.93,1686.62
  BottomLayer w5: J4.L43@138.19,2090.35 160.22,2112.38 195.88,2112.38 218.5,2135 400.32,2135 420.26,2154.94 441.15,2154.94 461.09,2135 492.84,2135 512.78,2154.94 533.67,2154.94 553.61,2135 568,2135 569,2136 601,2136 603.5,2138.5
  BottomLayer w10: 603.5,2138.5 1964.5,2138.5 2106,1997 2128,1997 2141,2010 2141,2025.16 v1(2136.16,2030)
LVDS2_1_P: J1.2 J4.L9 | length 3142
  TopLayer w10: v1(2160.84,2030) 2156,2025.16 2156,2016 2175,1997 2786,1997 2876,1907 2907.15,1907 2992.89,1821.26 2999.74,1828.11 3034.12,1828.11 3075.62,1786.62 J1.2@3116.93,1786.62
  BottomLayer w5: J4.L9@230.71,2106.1 249.61,2125 399.77,2125 420.26,2104.51 441.15,2104.51 461.65,2125 492.29,2125 512.78,2104.51 533.67,2104.51 554.17,2125 572.14,2125 573.14,2126 601,2126 603.5,2123.5
  BottomLayer w10: 603.5,2123.5 1958.28,2123.5 2099.79,1982 2134.21,1982 2156,2003.79 2156,2025.16 v1(2160.84,2030)
LVDS2_2_N: J1.6 J4.L44 | length 3937.5
  TopLayer w5: J4.L44@92.91,2121.85 112.97,2141.91 112.97,2163.79 127.74,2178.56 148.63,2178.56 164.38,2162.81 201.33,2162.81 220.26,2143.88 242.74,2143.88 316,2070.61 316,1805 318.5,1802.5
  TopLayer w10: 318.5,1802.5 318.5,1785 325,1778.5 325,1687.16 453.16,1559 915,1559 950,1594 1587.79,1594 1944.79,1951 2781,1951 2925,1807 2925,1657 2943,1639 3064.55,1639 J1.6@3116.93,1586.62
LVDS2_2_P: J1.5 J4.L10 | length 3699.9
  TopLayer w5: J4.L10@185.43,2137.6 187.83,2140 210,2140 216.12,2133.88 238.59,2133.88 306,2066.47 306,1805 303.5,1802.5
  TopLayer w10: 303.5,1802.5 303.5,1778.79 310,1772.29 310,1680.95 446.95,1544 921.21,1544 956.21,1579 1594,1579 1951,1936 2774.79,1936 2910,1800.79 2910,1650.79 2936.79,1624 2979.55,1624 J1.5@3016.93,1586.62
LVDS2_3_N: J1.9 J4.L45 | length 3740.2
  TopLayer w10: v1(2874,1968.84) 2874,1968 2878,1964 2999.21,1964 3041.21,1922 3062.16,1922 v1(3067,1926.84)
  BottomLayer w5: J4.L45@138.19,2153.35 160.22,2175.37 195.88,2175.37 220.5,2200 402.33,2200 420.26,2217.93 446.6,2217.93 465.54,2199 493.85,2199 512.78,2217.93 539.12,2217.93 558.06,2199 578.95,2199 579.95,2200 603,2200 605.5,2202.5
  BottomLayer w10: 605.5,2202.5 2618.5,2202.5 2857,1964 2869.16,1964 v1(2874,1968.84) ; J1.9@3016.93,1386.62 3016.93,1427.93 2975.44,1469.43 2975.44,1503.8 2982.29,1510.65 2945.08,1547.86 2945.08,1823.29 3043.79,1922 3062.16,1922 v1(3067,1926.84)
LVDS2_3_P: J1.8 J4.L11 | length 3602.7
  TopLayer w10: v1(2874,1944.16) 2874,1945 2878,1949 2993,1949 3035,1907 3062.16,1907 v1(3067,1902.16)
  BottomLayer w5: J4.L11@230.71,2169.09 251.61,2190 397.76,2190 420.26,2167.5 441.15,2167.5 460.09,2186.44 493.85,2186.44 512.78,2167.5 533.67,2167.5 555.17,2189 583.09,2189 584.1,2190 603,2190 605.5,2187.5
  BottomLayer w10: 605.5,2187.5 2612.29,2187.5 2850.79,1949 2869.16,1949 v1(2874,1944.16) ; v1(3067,1902.16) 3062.16,1907 3050,1907 2960.08,1817.08 2960.08,1554.08 2992.89,1521.26 2999.74,1528.11 3034.12,1528.11 3075.62,1486.62 J1.8@3116.93,1486.62
LVDS2_4_N: J1.12 J4.L46 | length 4398.9
  TopLayer w5: J4.L46@92.91,2184.84 68,2159.93 68,2132.6 67.7,2132.3 67.7,2111.41 68,2111.1 68,2108 67.7,2107.7 67.7,1738.3 144,1662 147.54,1662
  TopLayer w10: 147.54,1662 178,1631.54 178,1524 284,1418 456.16,1418 v1(461,1422.84) ; v1(1717.58,1653.42) 1719.96,1655.81 1731.6,1655.81 1982.79,1907 2775.21,1907 2886,1796.21 2886,1405 2957,1334 3069.55,1334 J1.12@3116.93,1286.62
  BottomLayer w10: v1(461,1422.84) 465.84,1418 737.79,1418 826.79,1507 1578,1507 1717.58,1646.58 v1(1717.58,1653.42)
LVDS2_4_P: J1.11 J4.L12 | length 4450.1
  TopLayer w5: 136.93,1651.39 136.93,1654.93 57.7,1734.16 57.7,2185.29 82.47,2210.06 103.36,2210.06 122.3,2191.12 175.96,2191.12 J4.L12@185.43,2200.59
  TopLayer w10: 136.93,1651.39 163,1625.32 163,1517.79 277.79,1403 456.16,1403 v1(461,1398.16) ; v1(1735.03,1635.97) 1735.03,1638.03 1989,1892 2769,1892 2871,1790 2871,1398.79 2950.79,1319 2984.55,1319 J1.11@3016.93,1286.62
  BottomLayer w10: v1(461,1398.16) 465.84,1403 744,1403 833,1492 1584.21,1492 1728.18,1635.97 v1(1735.03,1635.97)
LVDS2_5_N: J1.15 J4.L47 | length 4151.6
  TopLayer w10: v1(2912,2018.84) 2916.84,2014 2980,2014 2988,2006 3054.16,2006 v1(3059,2010.84)
  BottomLayer w5: J4.L47@138.19,2216.34 160.22,2238.37 195.88,2238.37 215.51,2258 397.34,2258 420.26,2280.93 441.15,2280.93 460.09,2261.99 493.85,2261.99 512.78,2280.93 533.67,2280.93 555.17,2259.43 583.09,2259.43 584.52,2258 596.86,2258 602.36,2263.5 650.71,2263.5 656.14,2258.07
  BottomLayer w10: 656.14,2258.07 659.61,2254.61 2649.39,2254.61 2890,2014 2907.16,2014 v1(2912,2018.84) ; J1.15@3016.93,1086.62 3016.93,1127.93 2975.44,1169.43 2975.44,1203.8 2982.29,1210.65 2900,1292.94 2900,1847.21 2992,1939.21 2992,1977.43 3020.57,2006 3054.16,2006 v1(3059,2010.84)
LVDS2_5_P: J1.14 J4.L13 | length 4007.8
  TopLayer w10: v1(2912,1994.16) 2916.84,1999 2973.79,1999 2981.79,1991 3054.16,1991 v1(3059,1986.16)
  BottomLayer w5: J4.L13@230.71,2232.09 246.62,2248 402.76,2248 420.26,2230.49 446.6,2230.49 465.54,2249.43 493.85,2249.43 512.78,2230.49 539.12,2230.49 558.06,2249.43 578.95,2249.43 580.38,2248 601,2248 604,2251 642,2251
  BottomLayer w10: 642,2251 653.39,2239.61 2643.18,2239.61 2883.79,1999 2907.16,1999 v1(2912,1994.16) ; v1(3059,1986.16) 3054.16,1991 3026.79,1991 3007,1971.21 3007,1933 2915,1841 2915,1299.15 2992.89,1221.26 2999.74,1228.11 3034.12,1228.11 3075.62,1186.62 J1.14@3116.93,1186.62
LVDS2_6_N: J1.18 J4.L48 | length 5025.6
  TopLayer w5: J4.L48@92.91,2247.83 75.14,2230.06 74.18,2230.06 68.12,2224 44.86,2224 25,2204.14 25,1724.86 120.86,1629 118.36,1626.5
  TopLayer w10: 118.36,1626.5 118.36,1482.43 226,1374.79 226,1322.84 v1(221.16,1318) ; v1(1505.47,1350.53) 1512.32,1350.53 2019.79,1858 2754.21,1858 2844,1768.21 2844,1127 2933,1038 3065.55,1038 J1.18@3116.93,986.62
  BottomLayer w10: v1(221.16,1318) 226,1322.84 226,1344.21 246.79,1365 284.21,1365 363.21,1286 823.21,1286 878.21,1341 1281.21,1341 1315.21,1307 1468.79,1307 1505.47,1343.68 v1(1505.47,1350.53)
LVDS2_6_P: J1.17 J4.L14 | length 4981.2
  TopLayer w5: 133.36,1625.5 130.86,1628 130.86,1633.14 127.93,1636.07 35,1729 35,2200 49,2214 72.27,2214 78.33,2220.06 106.25,2220.06 127.74,2241.56 163.41,2241.56 J4.L14@185.43,2263.58
  TopLayer w10: 133.36,1625.5 133.36,1488.64 241,1381 241,1322.84 v1(245.84,1318) ; v1(1522.92,1333.08) 1522.92,1339.92 2026,1843 2748,1843 2829,1762 2829,1120.79 2926.79,1023 2980.55,1023 J1.17@3016.93,986.62
  BottomLayer w10: v1(245.84,1318) 241,1322.84 241,1338 253,1350 278,1350 357,1271 829.43,1271 884.43,1326 1275,1326 1304.61,1296.39 1309,1292 1475,1292 1516.08,1333.08 v1(1522.92,1333.08)
LVDS2_7_N: J1.21 J4.L49 | length 4363.1
  BottomLayer w5: J4.L49@138.19,2279.33 165.52,2279.33 174.99,2288.8 201.33,2288.8 220.26,2269.86 241.15,2269.86 254.78,2283.48 298.63,2283.48 301.56,2286.41 329.57,2314.43 399.32,2314.43 420.26,2293.48 441.15,2293.48 460.09,2312.42 493.85,2312.42 512.78,2293.48 533.67,2293.48 554.62,2314.43 601.4,2314.43 602.97,2316
  BottomLayer w10: 602.97,2316 2694,2316 2939,2071 2939,1960.06 2849,1870.06 2849,1043.94 2982.29,910.65 2975.44,903.8 2975.44,869.43 3016.93,827.93 J1.21@3016.93,786.62
LVDS2_7_P: J1.20 J4.L15 | length 4267.1
  BottomLayer w5: J4.L15@230.71,2295.08 252.23,2295.08 253.82,2293.48 294.48,2293.48 344.92,2343.92 441.15,2343.92 460.09,2324.98 493.85,2324.98 512.78,2343.92 533.67,2343.92 553.16,2324.43 592.54,2324.43 599.11,2331
  BottomLayer w10: 599.11,2331 2700.21,2331 2954,2077.21 2954,1953.85 2864,1863.85 2864,1050.15 2992.89,921.26 2999.74,928.11 3034.12,928.11 3075.62,886.62 J1.20@3116.93,886.62
LVDS2_8_N: J1.24 J4.L50 | length 4910.4
  TopLayer w5: J4.L50@92.91,2310.83 99.19,2304.55 148.63,2304.55 164.38,2288.8 201.33,2288.8 220.26,2269.86 241.15,2269.86 254.78,2283.48 264.78,2283.48 315,2233.26 315,2098 332,2081 332,1796.86 345.93,1782.93 345.93,1708.68 355.09,1699.51 355.09,1695.98
  TopLayer w10: 355.09,1695.98 447.46,1603.61 895.61,1603.61 913,1621 1525.21,1621 1883.21,1979 1937.21,1979 1956,1997.79 1956,2015.16 v1(1960.84,2020)
  BottomLayer w10: v1(1960.84,2020) 1957,2020 1956,2019 1956,1973 2056,1873 2738.21,1873 2817,1794.21 2817,976.4 2937.19,856.21 2937.19,787.57 2984.64,740.12 3063.43,740.12 J1.24@3116.93,686.62
LVDS2_8_P: J1.23 J4.L16 | length 4700.6
  TopLayer w5: J4.L16@185.43,2326.57 191.71,2320.3 241.15,2320.3 255.93,2305.52 255.93,2302.33 264.78,2293.48 268.92,2293.48 325,2237.4 325,2102.14 342,2085.14 342,1801 353,1790 355.93,1787.07 355.93,1712.82 362.16,1706.58 365.7,1706.58
  TopLayer w10: 365.7,1706.58 453.68,1618.61 889.39,1618.61 906.79,1636 1519,1636 1877,1994 1931,1994 1941,2004 1941,2015.16 v1(1936.16,2020)
  BottomLayer w10: v1(1936.16,2020) 1940,2020 1941,2019 1941,1966.79 2049.79,1858 2732,1858 2802,1788 2802,970.19 2922.19,850 2922.19,787.19 2922,787 2922,781.55 J1.23@3016.93,686.62
LVDS3_1_N: J2.3 J4.L53 | length 3984.2
  TopLayer w10: v1(3168.27,1856.27) 3175.12,1856.27 3183.2,1848.2 ; 3187.59,1843.8 3200.39,1831 3308,1831 3331,1854 3352.33,1854 3388.82,1817.5 3388.82,1769.43 3430.32,1727.93 J2.3@3430.32,1686.62
  BottomLayer w5: J4.L53@138.19,2405.31 147.66,2414.78 195.88,2414.78 214.82,2395.85 241.15,2395.85 253.65,2408.34 396.33,2408.34 396.48,2408.19 445.32,2408.19 465.54,2387.97 493.85,2387.97 512.78,2406.91 539.12,2406.91 558.06,2387.97 578.95,2387.97 599.17,2408.19 607,2408.19 609.5,2405.69
  BottomLayer w10: 609.5,2405.69 3094.31,2405.69 3147.8,2352.2 3147.8,1883.59 3168.27,1863.12 v1(3168.27,1856.27)
LVDS3_1_P: J2.2 J4.L19 | length 3894.5
  TopLayer w10: v1(3185.73,1873.73) 3185.73,1866.88 3206.61,1846 3301.79,1846 3324.79,1869 3358.54,1869 3399.43,1828.11 3447.51,1828.11 3489,1786.62 J2.2@3530.32,1786.62
  BottomLayer w5: J4.L19@230.71,2421.06 233.43,2418.34 400.47,2418.34 400.62,2418.19 445.32,2418.19 465.54,2438.41 493.85,2438.41 512.78,2419.47 539.12,2419.47 558.06,2438.41 578.95,2438.41 599.17,2418.19 607,2418.19 609.5,2420.69
  BottomLayer w10: 609.5,2420.69 3100.52,2420.69 3162.8,2358.41 3162.8,1889.8 3178.88,1873.73 v1(3185.73,1873.73)
LVDS3_2_N: J2.6 J4.L54 | length 6178.8
  TopLayer w5: J4.L54@92.91,2436.81 119.88,2436.81 123.6,2440.53 152.78,2440.53 156.5,2436.81 165.52,2436.81 174.99,2427.34 201.33,2427.34 220.26,2446.28 247.14,2446.28 342,2541.14 342,2959 352,2969 352,2986 354.5,2988.5
  TopLayer w10: 354.5,2988.5 354.5,3074.5 561,3281 2510.21,3281 2613.21,3384 3377.79,3384 3397.68,3364.11 3543.11,3364.11 3560.08,3381.08 v1(3566.92,3381.08)
  BottomLayer w10: J2.6@3530.32,1586.62 3476.81,1640.12 3398.03,1640.12 3393.57,1644.57 3393.57,1645.64 3385.8,1653.41 3385.8,1665.37 3383.82,1667.36 3383.82,1705.87 3385.8,1707.86 3385.8,2013.8 3548.11,2176.11 3548.11,3369.11 3560.08,3381.08 v1(3566.92,3381.08)
LVDS3_2_P: J2.5 J4.L20 | length 6000.6
  TopLayer w5: J4.L20@185.43,2452.56 212.4,2452.56 216.12,2456.28 243,2456.28 332,2545.28 332,2963.14 342,2973.14 342,2986 339.5,2988.5
  TopLayer w10: 339.5,2988.5 339.5,3080.71 554.79,3296 2504,3296 2607,3399 3384,3399 3403.89,3379.11 3536.89,3379.11 3549.47,3391.68 v1(3549.47,3398.53)
  BottomLayer w10: J2.5@3430.32,1586.62 3376,1640.93 3376,1642 3370,1648 3370,1651 3370.8,1651.8 3370.8,1659.16 3368.82,1661.14 3368.82,1712.09 3370.8,1714.07 3370.8,2020.02 3533.11,2182.32 3533.11,3375.32 3549.47,3391.68 v1(3549.47,3398.53)
LVDS3_3_N: J2.9 J4.L55 | length 4281
  TopLayer w10: v1(3197.16,1782) 3199,1782 3202,1779 3202,1704.33 3388.82,1517.5 3388.82,1469.43 3430.32,1427.93 J2.9@3430.32,1386.62
  BottomLayer w5: J4.L55@138.19,2468.31 147.66,2477.78 195.88,2477.78 214.82,2458.84 241.15,2458.84 252.22,2469.9 446.6,2469.9 465.54,2450.96 493.85,2450.96 512.78,2469.9 539.12,2469.9 558.06,2450.96 578.95,2450.96 599.17,2471.18 608,2471.18 610.5,2468.68
  BottomLayer w10: 610.5,2468.68 3166.32,2468.68 3191,2444 3191,1997 3210.57,1977.43 3210.57,1863.44 3202,1854.87 3202,1786.84 v1(3197.16,1782)
LVDS3_3_P: J2.8 J4.L21 | length 4185.2
  TopLayer w10: v1(3221.84,1782) 3220,1782 3217,1779 3217,1710.54 3399.43,1528.11 3447.51,1528.11 3489,1486.62 J2.8@3530.32,1486.62
  BottomLayer w5: J4.L21@230.71,2484.06 232.3,2482.46 446.6,2482.46 465.54,2501.4 493.85,2501.4 512.78,2482.46 539.12,2482.46 558.06,2501.4 578.95,2501.4 599.17,2481.18 608,2481.18 610.5,2483.68
  BottomLayer w10: 610.5,2483.68 3172.53,2483.68 3206,2450.21 3206,2003.21 3225.57,1983.64 3225.57,1857.22 3217,1848.65 3217,1786.84 v1(3221.84,1782)
LVDS3_4_N: J2.12 J4.L56 | length 6470
  TopLayer w5: J4.L56@92.91,2499.8 165.52,2499.8 174.99,2490.33 201.33,2490.33 220.26,2509.27 260.41,2509.27 316,2564.86 316,2935 318.5,2937.5
  TopLayer w10: 318.5,2937.5 318.5,3102.5 533,3317 2487.21,3317 2594.21,3424 3413.79,3424 3433.18,3404.61 3475.61,3404.61 3492.58,3421.58 v1(3499.42,3421.58)
  BottomLayer w10: v1(3499.42,3421.58) 3497,3424 3495,3424 3483,3412 3483,2174 3343,2034 3343,1370 3367,1346 3405.18,1346 3411.06,1340.12 3476.81,1340.12 J2.12@3530.32,1286.62
LVDS3_4_P: J2.11 J4.L22 | length 6294.1
  TopLayer w5: J4.L22@185.43,2515.55 212.4,2515.55 216.12,2519.27 256.27,2519.27 306,2569 306,2935 303.5,2937.5
  TopLayer w10: 303.5,2937.5 303.5,3108.71 526.79,3332 2481,3332 2588,3439 3420,3439 3439.39,3419.61 3469.39,3419.61 3481.97,3432.18 v1(3481.97,3439.03)
  BottomLayer w10: J2.11@3430.32,1286.62 3385.93,1331 3360.79,1331 3328,1363.79 3328,2040.21 3468,2180.21 3468,3418.21 3484.39,3434.61 3484.39,3436.61 v1(3481.97,3439.03)
LVDS3_5_N: J2.15 J4.L57 | length 4705.5
  TopLayer w10: v1(3276.47,1253.47) 3283.32,1253.47 3301.25,1235.54 3370.79,1235.54 3388.82,1217.5 3388.82,1169.43 3430.32,1127.93 J2.15@3430.32,1086.62
  BottomLayer w5: J4.L57@138.19,2531.3 147.66,2540.77 195.88,2540.77 214.82,2521.83 241.15,2521.83 252.22,2532.89 446.6,2532.89 465.54,2513.96 493.85,2513.96 512.78,2532.89 539.12,2532.89 558.06,2513.96 578.95,2513.96 599.17,2534.17 608,2534.17 610.5,2531.67
  BottomLayer w10: 610.5,2531.67 3214.33,2531.67 3253,2493 3253,1283.79 3277.39,1259.39 3277.39,1254.39 v1(3276.47,1253.47)
LVDS3_5_P: J2.14 J4.L23 | length 4609.7
  TopLayer w10: v1(3293.92,1270.92) 3293.92,1264.08 3307.46,1250.54 3377,1250.54 3399.43,1228.11 3447.51,1228.11 3489,1186.62 J2.14@3530.32,1186.62
  BottomLayer w5: J4.L23@230.71,2547.05 232.3,2545.45 446.6,2545.45 465.54,2564.39 493.85,2564.39 512.78,2545.45 539.12,2545.45 558.06,2564.39 578.95,2564.39 599.17,2544.17 608,2544.17 610.5,2546.67
  BottomLayer w10: 610.5,2546.67 3220.54,2546.67 3268,2499.21 3268,1290 3288,1270 3293,1270 v1(3293.92,1270.92)
LVDS3_6_N: J2.18 J4.L58 | length 6855.5
  TopLayer w5: J4.L58@92.91,2562.8 165.52,2562.8 174.99,2553.33 201.33,2553.33 220.26,2572.26 263.41,2572.26 292,2600.86 292,2908.14 283,2917.14 283,2940 285.5,2942.5
  TopLayer w10: 285.5,2942.5 285.5,3120.5 517,3352 2463.21,3352 2581.21,3470 3523.79,3470 3563.68,3430.11 3630.11,3430.11 3645.58,3445.58 v1(3652.42,3445.58)
  BottomLayer w10: J2.18@3530.32,986.62 3538.62,986.62 3603.39,1051.39 3603.39,1699.18 3619,1714.79 3619,1791.01 3573,1837.01 3573,1837.72 3553.61,1857.11 3553.61,2005.39 3638,2089.79 3638,3438 3647,3447 3651,3447 v1(3652.42,3445.58)
LVDS3_6_P: J2.17 J4.L24 | length 6842.4
  TopLayer w5: J4.L24@185.43,2578.54 212.4,2578.54 216.12,2582.26 259.26,2582.26 282,2605 282,2904 273,2913 273,2940 270.5,2942.5
  TopLayer w10: 270.5,2942.5 270.5,3126.71 510.79,3367 2457,3367 2575,3485 3530,3485 3569.89,3445.11 3623.89,3445.11 3634.97,3456.18 v1(3634.97,3463.03)
  BottomLayer w10: J2.17@3430.32,986.62 3471.63,986.62 3513.13,1028.11 3558.9,1028.11 3588.39,1057.61 3588.39,1705.39 3604,1721 3604,1784.79 3558,1830.79 3558,1831.5 3538.61,1850.9 3538.61,2011.61 3623,2096 3623,3444.21 3636.39,3457.61 3636.39,3461.61 v1(3634.97,3463.03)
LVDS3_7_N: J2.21 J4.L59 | length 5037
  BottomLayer w5: J4.L59@138.19,2594.29 147.66,2603.76 195.88,2603.76 214.82,2584.82 241.15,2584.82 252.22,2595.89 446.6,2595.89 465.54,2576.95 493.85,2576.95 512.78,2595.89 539.12,2595.89 558.06,2576.95 578.95,2576.95 599.17,2597.17 607,2597.17 609.5,2594.67
  BottomLayer w10: 609.5,2594.67 3238.33,2594.67 3289,2544 3289,1333 3348,1274 3348,958.33 3388.82,917.5 3388.82,869.43 3430.32,827.93 J2.21@3430.32,786.62
LVDS3_7_P: J2.20 J4.L25 | length 4941.2
  BottomLayer w5: J4.L25@230.71,2610.04 232.3,2608.44 446.6,2608.44 465.54,2627.38 493.85,2627.38 512.78,2608.45 539.12,2608.45 558.06,2627.38 578.95,2627.38 599.17,2607.17 607,2607.17 609.5,2609.67
  BottomLayer w10: 609.5,2609.67 3244.55,2609.67 3304,2550.21 3304,1339.21 3363,1280.21 3363,964.54 3399.43,928.11 3447.51,928.11 3489,886.62 J2.20@3530.32,886.62
LVDS3_8_N: J2.24 J4.L60 | length 7330
  TopLayer w5: J4.L60@92.91,2625.79 165.52,2625.79 174.99,2616.32 201.33,2616.32 220.26,2635.26 228.59,2635.26 231.15,2637.82 245.3,2637.82 269,2661.52 269,2892.14 248,2913.14 248,2940 250.5,2942.5
  TopLayer w10: 250.5,2942.5 250.5,3151.5 486,3387 2444.21,3387 2577.21,3520 3631.79,3520 3691.68,3460.11 3720.11,3460.11 3735.58,3475.58 v1(3742.42,3475.58)
  BottomLayer w10: J2.24@3530.32,686.62 3544.62,686.62 3667,809 3667,1793.21 3634.21,1826 3633.5,1826 3608,1851.5 3608,1852.21 3588.61,1871.61 3588.61,1961.61 3728.5,2101.5 3728.5,3468.5 3737,3477 3741,3477 v1(3742.42,3475.58)